# EAGLE board i2c_relay (EAGLE 9.6.2)
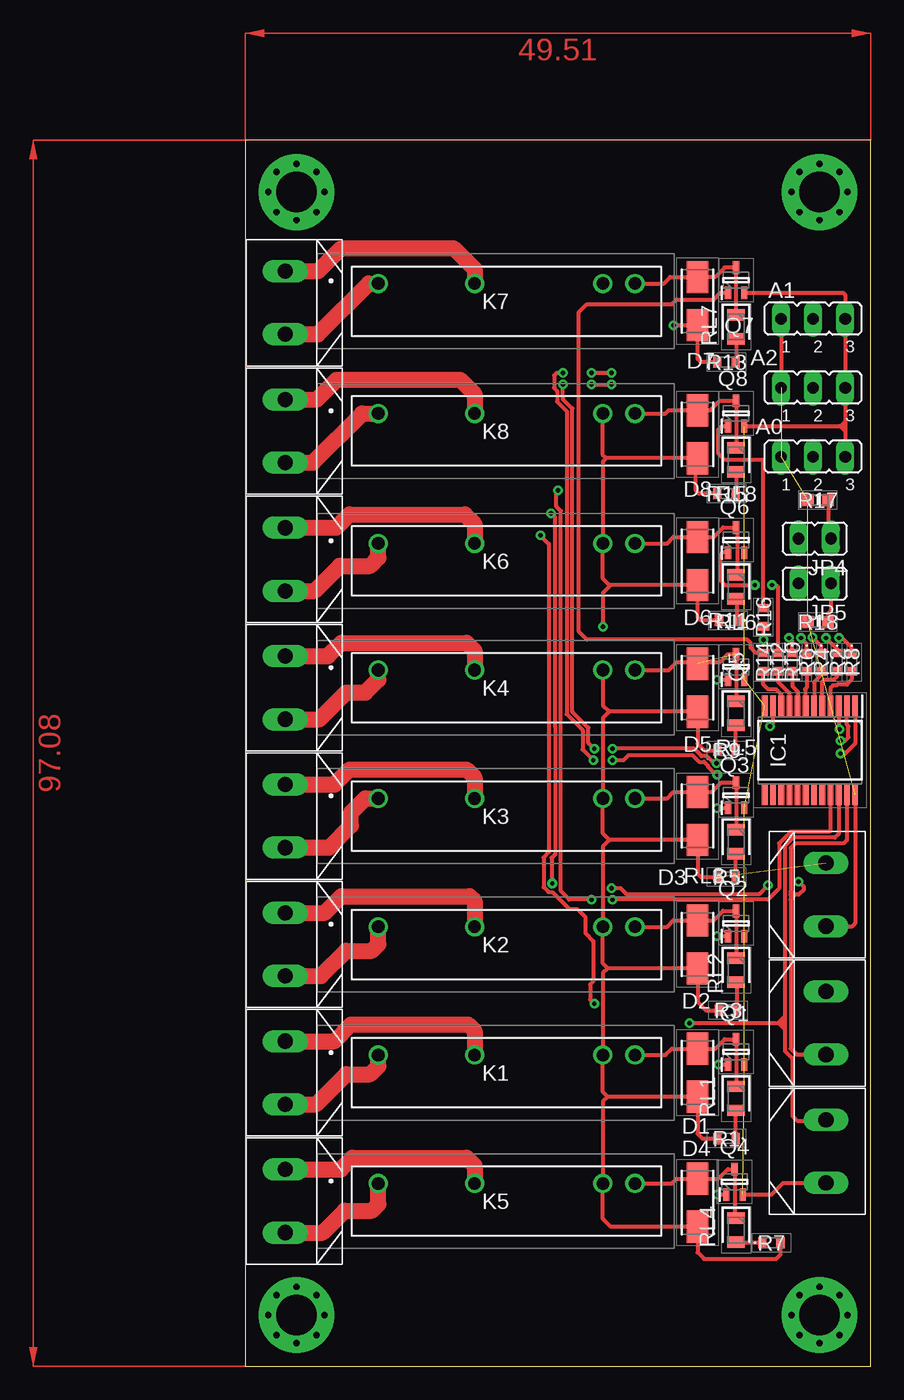
[diagram p0: board, top side]
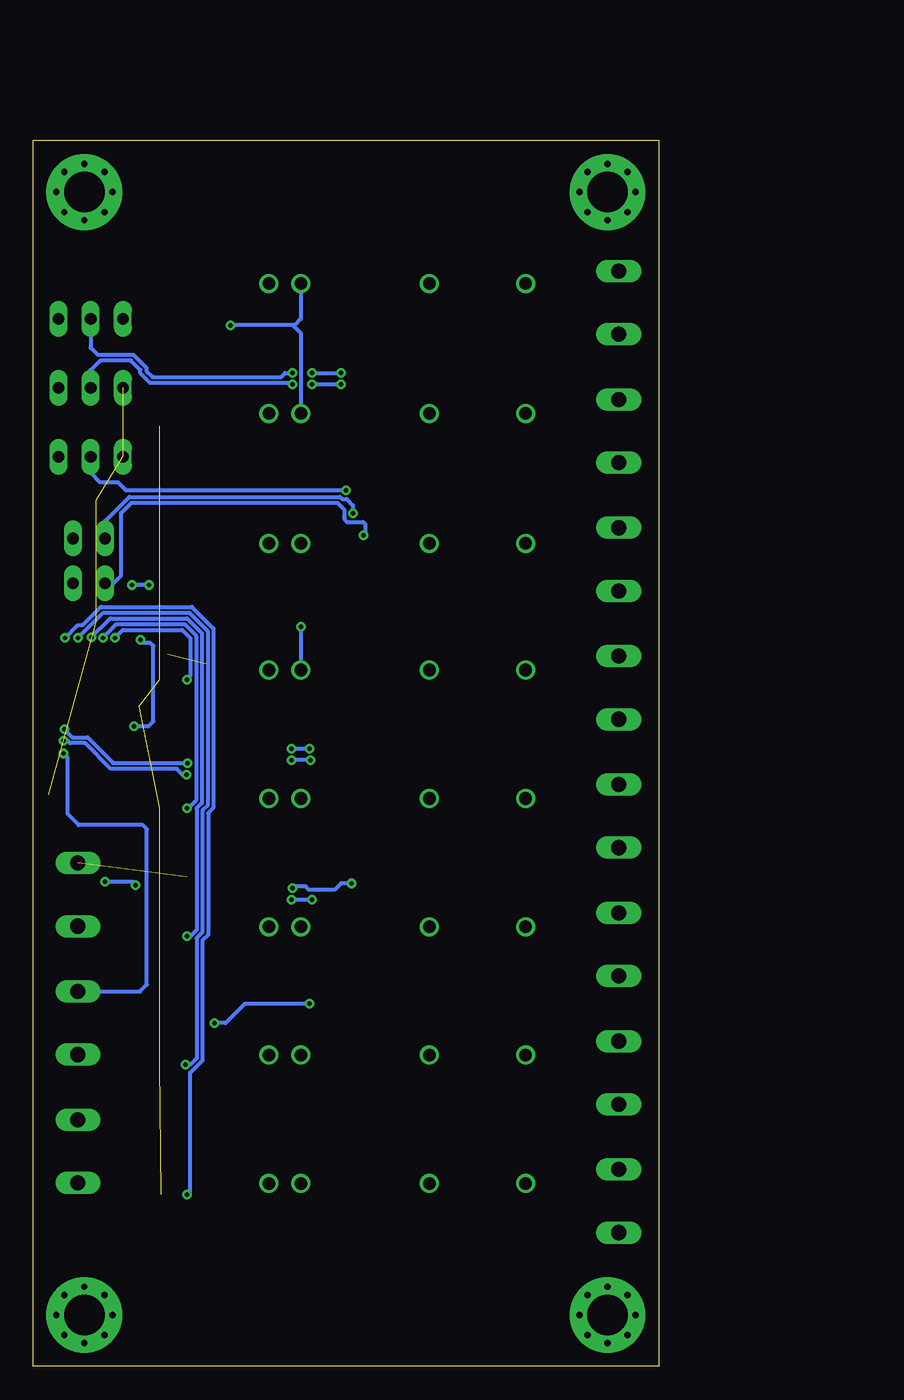
[diagram p1: board, bottom side, seen from below]

Size 49.51 x 97.08 mm. Coordinates in mm from the lower left corner, seen from the top.
Outline: 0,0 49.51,0 49.51,97.08 0,97.08 0,0
Copper layers (1*16): Top 0.035mm / dielectric 1.5mm / Bottom 0.035mm
Design rules "default": minimum track width 6mil, minimum drill 0.35mm, track to track 6mil, track to pad 6mil, pad to pad 6mil, via to via 6mil, smd to smd 6mil, copper to edge 40mil, drill to drill 6mil, minimum pad ring 10mil, minimum via ring 8mil, stop-mask expansion 4mil, vias tented up to drill 0mil, thermal gap 10mil

## Footprints (pad centres in the part's own frame; a part is rotated, then mirrored left to right if it is on the bottom)
JP2 = drill 0.914 long: 1 -2.54,0; 2 0,0; 3 2.54,0
DIONM5025X231N = smd 2.55 x 1.7: 1 -1.9,0; 2 1.9,0
3MM_HOLE = drill 3.2 pad 6: P$1 0,0 | drill 0.5 pad 0.61: P$2 0,2.223; P$3 0,-2.223; P$4 2.223,0; P$5 -2.223,0; P$6 -1.587,1.587; P$7 1.587,1.587; P$8 1.587,-1.587; P$9 -1.587,-1.587
SOP65P775X200-24N = smd 1.675 x 0.45: 1 -3.488,3.575; 2 -3.488,2.925; 3 -3.488,2.275; 4 -3.488,1.625; 5 -3.488,0.975; 6 -3.488,0.325; 7 -3.488,-0.325; 8 -3.488,-0.975; 9 -3.488,-1.625; 10 -3.488,-2.275; 11 -3.488,-2.925; 12 -3.488,-3.575; 13 3.488,-3.575; 14 3.488,-2.925; 15 3.488,-2.275; 16 3.488,-1.625; 17 3.488,-0.975; 18 3.488,-0.325; 19 3.488,0.325; 20 3.488,0.975; 21 3.488,1.625; 22 3.488,2.275; 23 3.488,2.925; 24 3.488,3.575
JP1 = drill 0.914 long: 1 0,-1.27; 2 0,1.27
G3MB202PLDC5 = drill 1 pad 1.5: 1 0,0; 2 -7.62,0; 3 -17.78,0; 4 -20.32,0
SOT65P210X110-3N = smd 1 x 0.5: 1 -1,0.65; 2 -1,-0.65; 3 1,0
ERA3AEB101V = smd 0.65 x 0.9: 1 -0.725,0; 2 0.725,0
RESC1608X55N = smd 0.9 x 0.95: 1 -0.8,0; 2 0.8,0
LEDC2012X80N = smd 0.9 x 1.4: 1 -0.95,0; 2 0.95,0
KF301-2P = drill 1.2 pad 1.778 long: 1 -2.5,0; 2 2.5,0

## Placement (x,y rotation side)
A0  [JP2]  44.96,72.01 0 top
A1  [JP2]  44.96,82.93 0 top
A2  [JP2]  44.96,77.47 0 top
D1  FM4004-W  [DIONM5025X231N]  35.81,23.24 90 top
D2  FM4004-W  [DIONM5025X231N]  35.81,33.4 90 top
D3  FM4004-W  [DIONM5025X231N]  35.81,43.56 90 top
D4  FM4004-W  [DIONM5025X231N]  35.81,12.95 90 top
D5  FM4004-W  [DIONM5025X231N]  35.81,53.72 90 top
D6  FM4004-W  [DIONM5025X231N]  35.81,63.75 90 top
D7  FM4004-W  [DIONM5025X231N]  35.81,84.33 90 top
D8  FM4004-W  [DIONM5025X231N]  35.81,73.79 90 top
H1  3MM_HOLE  [3MM_HOLE]  4.06,92.96 0 top
H2  3MM_HOLE  [3MM_HOLE]  4.06,4.06 0 top
H3  3MM_HOLE  [3MM_HOLE]  45.47,92.96 0 top
H4  3MM_HOLE  [3MM_HOLE]  45.47,4.06 0 top
IC1  PCF8575TS_1,118  [SOP65P775X200-24N]  44.7,48.77 270 top
JP4  [JP1]  45.09,65.53 90 top
JP5  [JP1]  45.09,61.98 90 top
K1  G3MB-202PL-DC5  [G3MB202PLDC5]  10.54,24.64 180 top
K2  G3MB-202PL-DC5  [G3MB202PLDC5]  10.54,34.8 180 top
K3  G3MB-202PL-DC5  [G3MB202PLDC5]  10.54,44.96 180 top
K4  G3MB-202PL-DC5  [G3MB202PLDC5]  10.54,55.12 180 top
K5  G3MB-202PL-DC5  [G3MB202PLDC5]  10.54,14.48 180 top
K6  G3MB-202PL-DC5  [G3MB202PLDC5]  10.54,65.15 180 top
K7  G3MB-202PL-DC5  [G3MB202PLDC5]  10.54,85.72 180 top
K8  G3MB-202PL-DC5  [G3MB202PLDC5]  10.54,75.44 180 top
Q1  MMST2222A-7-F  [SOT65P210X110-3N]  38.86,24.89 90 top
Q2  MMST2222A-7-F  [SOT65P210X110-3N]  38.86,35.05 90 top
Q3  MMST2222A-7-F  [SOT65P210X110-3N]  38.86,45.21 90 top
Q4  MMST2222A-7-F  [SOT65P210X110-3N]  38.73,14.61 90 top
Q5  MMST2222A-7-F  [SOT65P210X110-3N]  38.86,55.37 90 top
Q6  MMST2222A-7-F  [SOT65P210X110-3N]  38.86,65.41 90 top
Q7  MMST2222A-7-F  [SOT65P210X110-3N]  38.86,85.98 90 top
Q8  MMST2222A-7-F  [SOT65P210X110-3N]  38.86,75.44 90 top
R1  1k  [ERA3AEB101V]  38.1,18.03 180 top
R2  1k  [ERA3AEB101V]  46.86,55.75 270 top
R3  1k  [ERA3AEB101V]  38.23,28.19 180 top
R4  1k  [ERA3AEB101V]  45.59,55.75 270 top
R5  1k  [ERA3AEB101V]  38.1,38.73 180 top
R6  1k  [ERA3AEB101V]  44.45,55.75 270 top
R7  1k  [ERA3AEB101V]  41.66,9.78 0 top
R8  1k  [ERA3AEB101V]  48.01,55.75 270 top
R9  1k  [ERA3AEB101V]  38.1,48.77 180 top
R10  1k  [ERA3AEB101V]  43.31,55.75 270 top
R11  1k  [ERA3AEB101V]  38.23,59.05 180 top
R12  1k  [ERA3AEB101V]  42.16,55.75 270 top
R13  1k  [ERA3AEB101V]  38.1,79.5 180 top
R14  1k  [ERA3AEB101V]  41.02,55.75 270 top
R15  1k  [ERA3AEB101V]  38.1,69.09 180 top
R16  1k  [ERA3AEB101V]  41.02,59.31 270 top
R17  10k  [RESC1608X55N]  45.34,68.58 180 top
R18  10k  [RESC1608X55N]  45.34,58.93 180 top
RL1  150080SS75000  [LEDC2012X80N]  38.86,21.21 270 top
RL2  150080SS75000  [LEDC2012X80N]  38.86,31.37 270 top
RL3  150080SS75000  [LEDC2012X80N]  38.86,41.53 270 top
RL4  150080SS75000  [LEDC2012X80N]  38.86,10.79 270 top
RL5  150080SS75000  [LEDC2012X80N]  38.86,51.69 270 top
RL6  150080SS75000  [LEDC2012X80N]  38.86,61.72 270 top
RL7  150080SS75000  [LEDC2012X80N]  38.86,82.3 270 top
RL8  150080SS75000  [LEDC2012X80N]  38.86,71.75 270 top
U$1  TERMINAL_2P  [KF301-2P]  3.17,13.08 90 top
U$2  TERMINAL_2P  [KF301-2P]  3.17,23.24 90 top
U$3  TERMINAL_2P  [KF301-2P]  3.17,33.4 90 top
U$4  TERMINAL_2P  [KF301-2P]  3.17,43.56 90 top
U$5  TERMINAL_2P  [KF301-2P]  3.17,53.72 90 top
U$6  TERMINAL_2P  [KF301-2P]  3.17,63.88 90 top
U$7  TERMINAL_2P  [KF301-2P]  3.17,84.2 90 top
U$8  TERMINAL_2P  [KF301-2P]  3.17,74.04 90 top
U$9  TERMINAL_2P  [KF301-2P]  45.97,17.02 270 top
U$10  TERMINAL_2P  [KF301-2P]  45.97,27.18 270 top
U$11  TERMINAL_2P  [KF301-2P]  45.97,37.34 270 top

## Library data of the parts
A0 A1 A2 JP4 JP5 = jumper
D1-D8 = FM4004-W; DESCRIPTION: Rectifiers 1N4004 1A 400V; HEIGHT: 2.31mm; MANUFACTURER_NAME: Rectron; MANUFACTURER_PART_NUMBER: FM4004-W; MOUSER_PART_NUMBER: 583-FM4004; MOUSER_PRICE-STOCK: https://www.mouser.co.uk/ProductDetail/Rectron/FM4004-W?qs=Iw9Ubr57Px3IHNH1bE4l9w%3D%3D
H1-H4 = 3mm_special_hole
IC1 = SamacSys_Parts; DESCRIPTION: Interface - I/O Expanders; DIGIKEY_PARTNUMBER: 568-1079-1-ND; DIGIKEY_PRICE-STOCK: https://www.digikey.com/product-detail/en/nxp-usa-inc/PCF8575TS-1-118/568-1079-1-ND/735793; HEIGHT: 2mm; MANUFACTURER_NAME: NXP; MANUFACTURER_PART_NUMBER: PCF8575TS/1,118; MOUSER_PART_NUMBER: 771-PCF8575TSDB-T; MOUSER_PRICE-STOCK: https://www.mouser.co.uk/ProductDetail/NXP-Semiconductors/PCF8575TS-1118?qs=LOCUfHb8d9vMl26vh33NWQ%3D%3D
K1-K8 = G3MB-202PL-DC5; DESCRIPTION: Solid State Relays - PCB Mount 5VDC/100-240VAC 2A; HEIGHT: 20.5mm; MANUFACTURER_NAME: Omron Electronics; MANUFACTURER_PART_NUMBER: G3MB-202PL-DC5; MOUSER_PART_NUMBER: 653-G3MB-202PL-DC5; MOUSER_PRICE-STOCK: https://www.mouser.co.uk/ProductDetail/Omron-Automation-and-Safety/G3MB-202PL-DC5?qs=CX134%252BdLMDF4X9k4CH7R5g%3D%3D
Q1-Q8 = MMST2222A-7-F; DESCRIPTION: Bipolar (BJT) Transistor NPN 40 V 600 mA 300MHz 200 mW Surface Mount SOT-323; HEIGHT: 1.1mm; MANUFACTURER_NAME: Diodes Incorporated; MANUFACTURER_PART_NUMBER: MMST2222A-7-F; MOUSER_PART_NUMBER: 621-MMST2222A-F; MOUSER_PRICE-STOCK: https://www.mouser.co.uk/ProductDetail/Diodes-Incorporated/MMST2222A-7-F?qs=B0AElM0L7fPu4CagNNXsRQ%3D%3D
R1-R16 = ERA-3AED102V; DESCRIPTION: Thin Film Resistors - SMD 0603 1000ohms 25ppm 0.5% AEC-Q200; HEIGHT: 0.55mm; MANUFACTURER_NAME: Panasonic; MANUFACTURER_PART_NUMBER: ERA-3AED102V; MOUSER_PART_NUMBER: 667-ERA-3AED102V; MOUSER_PRICE-STOCK: https://www.mouser.co.uk/ProductDetail/Panasonic/ERA-3AED102V?qs=yocZuyCaXdNrh6oeFjCchg%3D%3D
R17 R18 = AccesControlNFC; DESCRIPTION: Thick Film Resistors - SMD 0603 10Kohm 5% Anti Surge AEC-Q200; DIGIKEY_PARTNUMBER: RHM10KDCT-ND; DIGIKEY_PRICE-STOCK: https://www.digikey.com/product-detail/en/rohm-semiconductor/ESR03EZPJ103/RHM10KDCT-ND/1762925; HEIGHT: 0.55mm; MANUFACTURER_NAME: ROHM Semiconductor; MANUFACTURER_PART_NUMBER: ESR03EZPJ103; MOUSER_PART_NUMBER: 755-ESR03EZPJ103; MOUSER_PRICE-STOCK: https://www.mouser.com/Search/Refine.aspx?Keyword=755-ESR03EZPJ103
RL1-RL8 = SamacSys_Parts; DESCRIPTION: Wurth Elektronik 150080SS75000, WL-SMCW Series Red LED, 630 nm, 2012 (0805) Clear, Rectangle Lens SMD Package; DIGIKEY_PARTNUMBER: 732-4985-1-ND; DIGIKEY_PRICE-STOCK: https://www.digikey.com/product-detail/en/w%C3%BCrth-elektronik/150080SS75000/732-4985-1-ND/4489919; HEIGHT: 0.8mm; MANUFACTURER_NAME: Wurth Elektronik; MANUFACTURER_PART_NUMBER: 150080SS75000; MOUSER_PART_NUMBER: 710-150080SS75000; MOUSER_PRICE-STOCK: https://www.mouser.co.uk/ProductDetail/Wurth-Elektronik/150080SS75000?qs=LlUlMxKIyB2zzpiaOzrUdw%3D%3D
U$1-U$11 = KF301-2P-Terminal

## Nets
+5V: D1.1 D2.1 D3.1 D4.1 D5.1 D6.1 D7.1 D8.1 K1.3 K2.3 K3.3 K4.3 K5.3 K6.3 K7.3 K8.3 R1.2 R3.2 R5.2 R7.2 R9.2 R11.2 R13.2 R15.2 U$11.1
A0: A0.2 IC1.21
A1: A1.2 IC1.2
A2: A2.2 IC1.3
COM0: K5.1 U$1.1
COM1: K1.1 U$2.1
COM2: K2.1 U$3.1
COM3: K3.1 U$4.1
COM4: K4.1 U$5.1
COM5: K6.1 U$6.1
COM6: K7.1 U$7.1
COM7: K8.1 U$8.1
GND: A0.3 A1.3 A2.3 IC1.12 Q1.2 Q2.2 Q3.2 Q4.2 Q5.2 Q6.2 Q7.2 Q8.2 U$9.2
INT: IC1.1 U$10.1
IO0: IC1.13
IO1: IC1.14
IO2: IC1.15
IO3: IC1.16
IO4: IC1.17
IO5: IC1.18
IO6: IC1.19
IO7: IC1.20
N$1: R1.1 RL1.2
N$2: D1.2 K1.4 Q1.3 RL1.1
N$3: Q1.1 R2.1
N$4: R3.1 RL2.2
N$5: D2.2 K2.4 Q2.3 RL2.1
N$6: Q2.1 R4.1
N$7: R5.1 RL3.2
N$8: D3.2 K3.4 Q3.3 RL3.1
N$9: Q3.1 R6.1
N$10: R7.1 RL4.2
N$11: D4.2 K5.4 Q4.3 RL4.1
N$12: Q4.1 R8.1
N$13: R9.1 RL5.2
N$14: D5.2 K4.4 Q5.3 RL5.1
N$15: Q5.1 R10.1
N$16: R11.1 RL6.2
N$17: D6.2 K6.4 Q6.3 RL6.1
N$18: Q6.1 R12.1
N$19: R13.1 RL7.2
N$20: D7.2 K7.4 Q7.3 RL7.1
N$21: Q7.1 R14.1
N$22: R15.1 RL8.2
N$23: D8.2 K8.4 Q8.3 RL8.1
N$24: Q8.1 R16.1
N$25: JP4.1 R17.1
N$27: JP5.1 R18.1
NO0: K5.2 U$1.2
NO1: K1.2 U$2.2
NO2: K2.2 U$3.2
NO3: K3.2 U$4.2
NO4: K4.2 U$5.2
NO5: K6.2 U$6.2
NO6: K7.2 U$7.2
NO7: K8.2 U$8.2
RELAY0: IC1.4 R8.2
RELAY1: IC1.5 R2.2
RELAY2: IC1.6 R4.2
RELAY3: IC1.7 R6.2
RELAY4: IC1.8 R10.2
RELAY5: IC1.9 R12.2
RELAY6: IC1.10 R14.2
RELAY7: IC1.11 R16.2
SCL: IC1.22 JP5.2 U$9.1
SDA: IC1.23 JP4.2 U$10.2
VCC: A0.1 A1.1 A2.1 IC1.24 R17.2 R18.2 U$11.2

## Tracks (layer width: path | path; a pad name or v marks a point on that pad's centre or on a via)
+5V  (via drill 0.35)  (1 unrouted)
  Top 0.305: D8.1 35.69,71.89 | 35.69,71.89 28.57,71.89 | K8.3 28.32,72.14 28.57,71.89 | R13.2 36.07,79.5 35.81,79.76 D7.1 v33.91,82.43 v33.91,82.42 | R15.2 35.94,69.09 35.69,69.34 35.69,71.89 | R11.2 36.07,59.05 35.81,59.31 D6.1 28.96,61.85 | 28.96,61.85 28.82,61.85 28.32,62.36 K6.3 28.32,71.64 28.57,71.89 | K4.3 28.32,52.32 28.82,51.82 | 28.82,51.82 D5.1 35.81,49.28 36.32,48.77 R9.2 | 28.83,41.66 D3.1 35.81,38.99 36.07,38.73 R5.2 | 28.83,41.66 28.82,41.66 28.32,42.16 K3.3 28.32,51.32 28.82,51.82 | 28.7,31.5 D2.1 35.81,28.83 36.45,28.19 R3.2 | 28.7,31.5 28.32,31.88 K2.3 28.32,41.15 28.83,41.66 | 28.7,21.34 D1.1 35.81,18.41 36.2,18.03 R1.2 | 28.7,21.34 28.32,21.72 K1.3 28.32,31.12 28.7,31.5 | R7.2 42.38,8.85 42.04,8.51 36.32,8.51 35.81,9.02 D4.1 28.95,11.05 28.32,11.68 K5.3 28.32,20.96 28.7,21.34 | 28.96,61.85 28.32,61.22 v28.32,58.55
  Bottom 0.305: K7.3 28.32,82.93 28.83,82.42 28.96,82.42 | 28.96,82.42 v33.91,82.42 | 28.96,82.42 28.32,81.79 K8.3 | v28.32,58.55 K4.3
A0  (via drill 0.35)
  Top 0.305: IC1.21 46.33,42.42 46.23,42.32 43.18,42.32 42.27,41.4 42.27,37.82 41.4,36.96 v29.08,36.96 | v27.43,36.96 25.65,36.96 24.99,37.62 24.99,67.72 24.64,68.07 24.64,69.21 v24.77,69.34
  Bottom 0.305: v29.08,36.96 v27.43,36.96 | v24.77,69.34 42.16,69.34 42.8,69.98 44.2,69.98 44.96,70.74 A0.2
A1  (via drill 0.35)
  Top 0.305: v29,78.63 v27.43,78.63 | v25.15,78.63 24.66,78.63 24.46,78.44 24.46,77.44 24.69,77.21 24.69,76.39 25.45,75.63 25.45,51.63 26.72,50.36 26.72,48.82 v27.56,47.99 | v29.08,47.99 29.95,47.99 30.35,48.39 35.41,48.39 35.94,47.85 36.34,47.85 36.63,47.56 36.63,47.47 37.25,46.84 v37.37,46.84 | v47.12,49.51 47.48,49.51 47.75,49.78 47.75,50.67 47.62,50.8 IC1.2
  Bottom 0.305: A1.2 44.96,80.64 44.4,80.09 41.59,80.09 40.56,79.06 40.56,78.8 40.07,78.31 29.9,78.31 29.57,78.63 v29,78.63 | v27.43,78.63 v25.15,78.63 | v27.56,47.99 v29.08,47.99 | v37.37,46.84 37.7,46.84 38.15,47.3 43.37,47.3 45.4,49.33 46.59,49.33 46.78,49.51 v47.12,49.51
A2  (via drill 0.35)
  Top 0.305: IC1.3 46.98,50.48 v47.04,50.42 | v37.31,47.75 37.08,47.75 36.52,48.31 36.13,48.31 35.55,48.9 v29.08,48.9 | v27.64,48.9 27.18,49.36 27.18,50.55 25.91,51.82 25.91,75.82 25.15,76.58 v25.15,77.72 | v27.43,77.72 v29,77.72
  Bottom 0.305: v47.04,50.42 46.4,49.78 45.21,49.78 43.18,47.75 v37.31,47.75 | v29.08,48.9 v27.64,48.9 | v25.15,77.72 v27.43,77.72 | v29,77.72 29.13,77.85 40.26,77.85 41.02,78.61 41.02,78.87 41.78,79.63 44.2,79.63 44.96,78.87 A2.2
COM0
  Top 1.27: U$1.1 6.14,10.58 7.87,12.32 10.03,12.32 10.54,12.83 K5.1
COM1
  Top 1.27: U$2.1 5.63,20.74 8,23.11 9.91,23.11 10.54,23.75 K1.1
COM2
  Top 1.27: U$3.1 6.01,30.9 8,32.89 10.03,32.89 10.54,33.4 K2.1
COM3
  Top 1.27: U$4.1 6.64,41.06 8.38,42.8 8.38,43.82 9.53,44.96 K3.1
COM4
  Top 1.27: U$5.1 5.88,51.22 8,53.34 9.53,53.34 10.54,54.36 K4.1
COM5
  Top 1.27: U$6.1 5.5,61.38 7.49,63.37 9.91,63.37 10.54,64.01 K6.1
COM6
  Top 1.27: U$7.1 5.75,81.7 9.78,85.72 K7.1
COM7
  Top 1.27: U$8.1 5.37,71.54 9.27,75.44 K8.1
GND  (7 unrouted)
  Top 0.305: Q7.2 47.35,84.98 47.5,84.84 A1.3 A2.3 47.5,74.8 | 47.5,74.8 47.5,74.04 | 47.5,74.04 A0.3 | Q8.2 47.1,74.44 | 47.1,74.44 47.5,74.04 | 47.1,74.44 47.13,74.44 47.5,74.8 | Q4.2 41.67,13.61 42.59,14.52 U$9.2
INT  (via drill 0.35)
  Top 0.305: IC1.1 48.28,49.3 47.5,48.51 v47.12,48.51
  Bottom 0.305: U$10.1 41.06,29.68 40.51,30.23 40.51,42.53 40.83,42.85 45.91,42.85 46.81,43.75 46.81,48.21 v47.12,48.51
N$1
  Top 0.305: R1.1 38.83,20.22 RL1.2
N$2
  Top 0.305: K1.4 33.27,24.64 33.78,25.15 D1.2 37.21,25.14 37.96,25.89 Q1.3 RL1.1
N$3  (via drill 0.35)
  Top 0.305: R2.1 46.86,56.77 v45.97,57.66 | v37.47,23.88 37.48,23.89 Q1.1
  Bottom 0.305: v45.97,57.66 43.97,59.66 37.15,59.66 35.71,58.23 35.71,44.4 36.12,44 36.12,34.36 36.58,33.9 36.58,24.38 37.08,23.88 v37.47,23.88
N$4
  Top 0.305: R3.1 38.95,30.33 RL2.2
N$5
  Top 0.305: K2.4 33.4,34.8 33.9,35.3 D2.2 37.08,35.3 37.83,36.05 Q2.3 RL2.1
N$6  (via drill 0.35)
  Top 0.305: R4.1 45.59,57.02 v44.9,57.72 | v37.34,34.04 37.35,34.05 Q2.1
  Bottom 0.305: v44.9,57.72 43.41,59.21 37.34,59.21 36.17,58.04 36.17,44.59 36.58,44.18 36.58,34.54 37.08,34.04 v37.34,34.04
N$7
  Top 0.305: R5.1 38.83,40.54 RL3.2
N$8
  Top 0.305: K3.4 33.4,44.96 33.9,45.46 D3.2 36.95,45.46 37.7,46.21 Q3.3 RL3.1
N$9  (via drill 0.35)
  Top 0.305: R6.1 44.45,57.2 v43.99,57.66 | v37.34,44.2 37.35,44.21 Q3.1
  Bottom 0.305: v43.99,57.66 43.74,57.91 43.74,57.94 42.93,58.75 37.53,58.75 36.63,57.85 36.63,44.78 37.21,44.2 v37.34,44.2
N$10
  Top 0.305: R7.1 38.93,9.78 RL4.2
N$11
  Top 0.305: K5.4 33.78,14.48 34.16,14.85 D4.2 37.46,14.85 38.21,15.61 Q4.3 38.73,11.87 RL4.1
N$12  (via drill 0.35)
  Top 0.305: R8.1 48.01,56.9 47.24,57.66 v46.99,57.66 | v37.34,13.59 37.35,13.61 Q4.1
  Bottom 0.305: v37.34,13.59 37.08,13.84 37.08,23.23 36.57,23.74 36.44,23.87 36.12,24.2 36.12,33.71 35.66,34.16 35.66,43.81 35.26,44.21 35.26,58.42 36.96,60.12 44.16,60.12 45.6,58.67 45.97,58.67 v46.99,57.66
N$13
  Top 0.305: R9.1 38.83,50.7 RL5.2
N$14  (1 unrouted)
  Top 0.305: K4.4 33.53,55.12 34.16,55.75 37.59,55.75 38.21,56.37 Q5.3 RL5.1
N$15  (via drill 0.35)
  Top 0.305: R10.1 43.31,57.4 v43.05,57.66 | v37.34,54.36 37.35,54.37 Q5.1
  Bottom 0.305: v43.05,57.66 42.42,58.29 37.72,58.29 37.08,57.66 37.08,54.61 v37.34,54.36
N$16
  Top 0.305: R11.1 38.95,60.68 RL6.2
N$17
  Top 0.305: K6.4 33.4,65.15 33.9,65.65 D6.2 37.08,65.65 37.83,66.41 Q6.3 38.96,66.31 38.96,62.77 RL6.1
N$18  (via drill 0.35)
  Top 0.305: Q6.1 37.73,64.41 37.59,64.26 37.59,62.23 37.97,61.85 v40.34,61.85 | v41.7,61.85 42.04,61.85 42.16,61.72 R12.1
  Bottom 0.305: v40.34,61.85 v41.7,61.85
N$19
  Top 0.305: RL7.2 38.86,79.54 R13.1
N$20
  Top 0.305: K7.4 33.15,85.72 33.65,86.23 D7.2 37.21,86.23 37.96,86.98 Q7.3 RL7.1
N$21
  Top 0.305: R14.1 40.42,56.48 40.01,56.9 40.01,57.28 39.75,57.53 27.05,57.53 26.42,58.17 26.42,83.44 27.05,84.07 33.78,84.07 34.16,84.45 37.08,84.45 37.61,84.98 Q7.1
N$22
  Top 0.305: RL8.2 38.86,69.12 R15.1
N$23
  Top 0.305: K8.4 33.27,75.44 33.53,75.69 D8.2 36.83,75.69 37.58,76.44 Q8.3 RL8.1
N$24
  Top 0.305: R16.1 41.02,71.63 40.89,71.75 37.97,71.75 37.47,72.26 37.47,74.17 37.73,74.44 Q8.1
N$25
  Top 0.305: R17.1 46.14,65.75 JP4.1
N$27
  Top 0.305: JP5.1 46.35,59.82 46.14,59.6 R18.1
NO0
  Top 1.27: U$1.2 7.58,15.58 8.51,16.51 17.53,16.51 18.16,15.88 K5.2
NO1
  Top 1.27: U$2.2 7.07,25.74 8.38,27.05 17.65,27.05 18.16,26.54 K1.2
NO2
  Top 1.27: U$3.2 6.31,35.9 7.62,37.21 17.78,37.21 18.16,36.83 K2.2
NO3
  Top 1.27: U$4.2 7.07,46.06 8.26,47.24 17.53,47.24 18.16,46.61 K3.2
NO4
  Top 1.27: U$5.2 6.56,56.22 7.62,57.28 17.53,57.28 18.16,56.64 K4.2
NO5
  Top 1.27: U$6.2 7.2,66.38 8.26,67.44 17.4,67.44 18.16,66.67 K6.2
NO6
  Top 1.27: U$7.2 5.8,86.7 7.62,88.52 16.51,88.52 18.16,86.87 K7.2
NO7
  Top 1.27: U$8.2 5.67,76.54 7.24,78.1 17.02,78.1 18.16,76.96 K8.2
RELAY0
  Top 0.305: R8.2 48.01,54.36 47.62,53.98 46.88,53.98 46.8,53.9 46.53,53.9 46.33,53.7 IC1.4
RELAY1
  Top 0.305: IC1.5 45.68,54.18 45.86,54.36 46.61,54.36 46.86,54.61 R2.2
RELAY2
  Top 0.305: R4.2 45.59,54.74 45.03,54.17 IC1.6
RELAY3
  Top 0.305: R6.2 44.45,53.72 44.32,53.59 44.32,52.31 IC1.7
RELAY4
  Top 0.305: R10.2 43.31,53.85 43.73,53.43 IC1.8
RELAY5
  Top 0.305: R12.2 42.16,54.23 43.08,53.31 IC1.9
RELAY6
  Top 0.305: IC1.10 42.43,53.2 42.04,53.59 41.4,53.59 41.02,53.98 R14.2
RELAY7  (via drill 0.35)
  Top 0.305: IC1.11 41.78,50.92 v41.53,50.67 | R16.2 v41.02,57.53
  Bottom 0.305: v41.53,50.67 40.39,50.67 40.01,51.05 40.01,57.02 40.26,57.28 40.77,57.28 v41.02,57.53
SCL  (via drill 0.35)
  Top 0.305: IC1.22 46.98,42.15 46.69,41.86 43.37,41.86 42.72,41.21 42.72,27.69 | 42.72,27.69 42.72,27.18 | 42.72,27.18 42.72,26.67 | 42.72,26.67 42.72,24.96 43.31,24.37 43.31,19.81 43.69,19.43 45.89,19.43 U$9.1 | v23.37,65.79 24.05,65.1 24.05,40.7 23.63,40.28 23.63,37.94 24.03,37.54 24.3,37.54 25.65,36.2 26.29,36.2 26.92,35.56 26.92,34.29 27.56,33.66 27.56,30.48 27.3,30.23 27.3,29.04 v27.64,28.7 | v35.18,27.18 42.22,27.18 | 42.22,27.18 42.72,27.69 | 42.22,27.18 42.72,26.67 | 42.22,27.18 42.72,27.18
  Bottom 0.305: JP5.2 43.18,61.98 42.55,62.61 42.55,67.55 41.72,68.38 25.45,68.38 24.9,67.83 24.9,67.24 24.89,67.23 24.89,67.06 24.68,66.84 23.41,66.84 23.24,66.67 23.24,65.91 v23.37,65.79 | v27.64,28.7 32.77,28.7 34.29,27.18 v35.18,27.18
SDA  (via drill 0.35)
  Top 0.305: IC1.23 47.63,41.66 47.37,41.4 43.56,41.4 43.18,41.02 43.18,37.59 | U$10.2 43.65,24.68 43.18,25.15 43.18,36.96 | 43.18,37.59 43.18,37.34 | 43.18,37.34 43.18,36.96 | v24.22,67.53 24.51,67.23 24.51,50.67 24.54,50.65 24.54,40.54 24.26,40.26 24.26,38.28 v24.31,38.23 | v29,37.87 29.7,37.87 30.15,37.41 40.72,37.41 v41.4,38.1 | v43.81,38.35 44.2,37.97 44.2,37.72 43.81,37.34 43.56,37.34 | 43.43,37.34 43.18,37.34 | 43.56,37.34 43.43,37.34 | 43.43,37.34 43.18,37.59 | 43.56,37.34 43.18,36.96
  Bottom 0.305: JP4.2 43.81,66.93 41.91,68.83 25.23,68.83 25.05,68.66 24.72,68.66 24.22,68.16 v24.22,67.53 | v24.31,38.23 25.15,38.23 25.65,37.72 27.69,37.72 27.94,37.97 28.9,37.97 v29,37.87 | v41.4,38.1 41.66,38.35 v43.81,38.35
VCC  (4 unrouted)
  Top 0.305: U$11.2 46.01,34.8 48.01,34.8 48.28,35.07 IC1.24 | A1.1 A2.1
(copper drawn outside any net)
  shapes: Top area x2